# Altium PCB PCB1.PcbDoc
Units mil, origin at the board's own origin, x right, y up, seen from the top; angles counter-clockwise.
Board outline 6000 x 4000 mil, 2 copper layers (Top Layer, Bottom Layer); 17 components, 37 nets, 121 pads, 0 vias.
Unrouted connection lines stored in the file: 4.
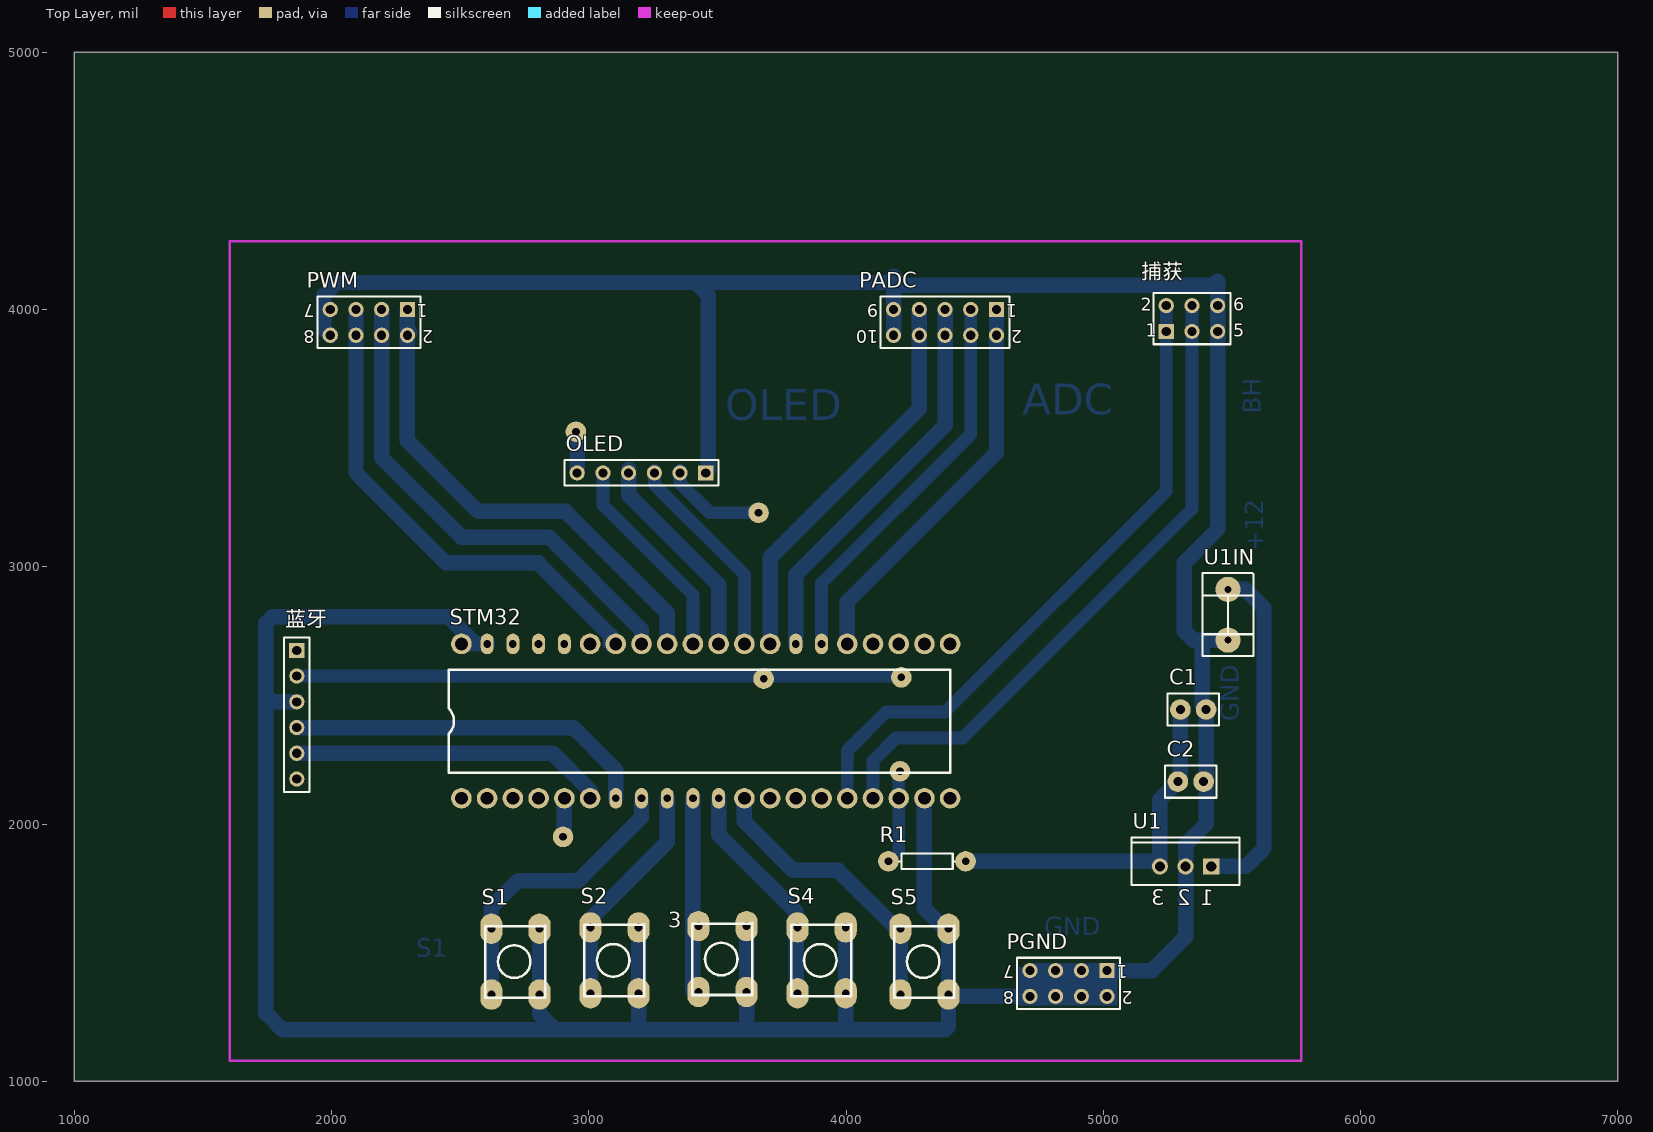
[diagram p0: Top Layer view]
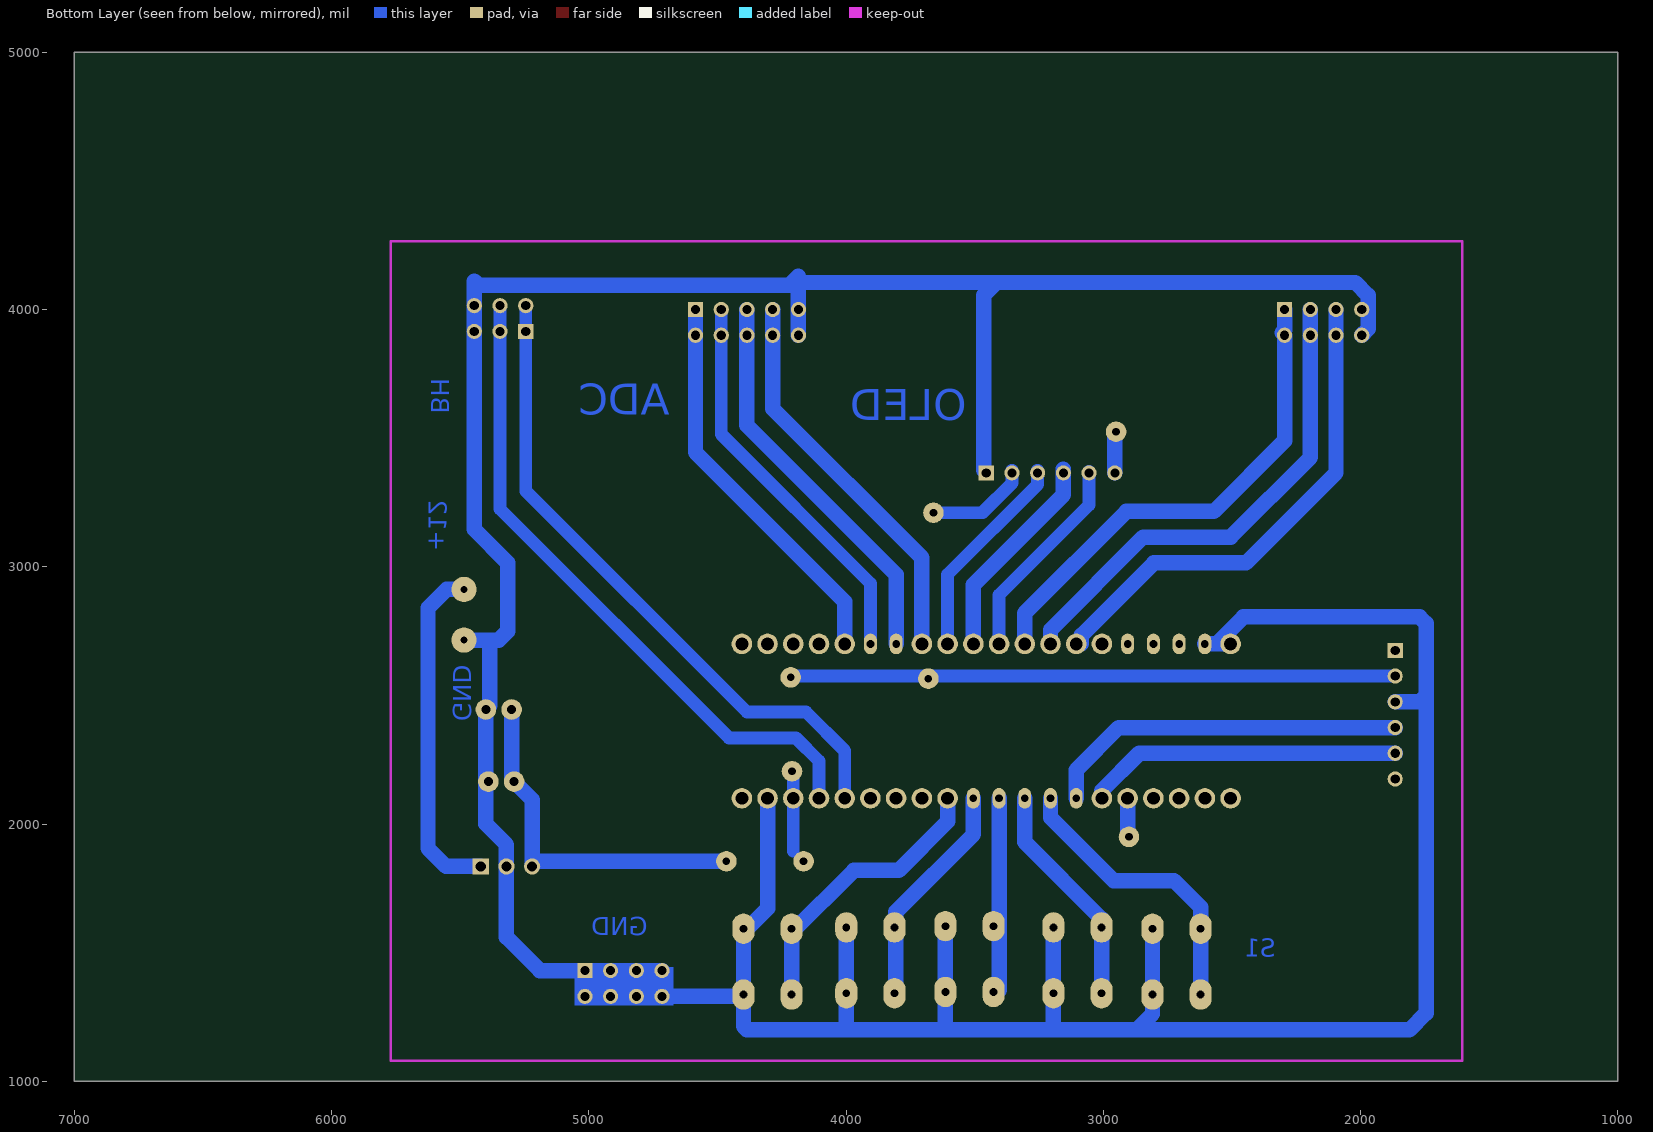
[diagram p1: Bottom Layer view, seen from below]

## Layer stack, top to bottom
Top Solder: solder mask 0.4, Solder Resist, Dk 3.5
Top Layer: signal copper 1.4
Dielectric 1: dielectric 12.6, FR-4, Dk 4.8
Bottom Layer: signal copper 1.4
Bottom Solder: solder mask 0.4, Solder Resist, Dk 3.5

## Board outline
1000,1000 7000,1000 7000,5000 1000,5000

## Design rules (kind name [scope] priority, off if disabled: settings)
Clearance [All] p1: gap=10
ComponentClearance [All] p1: gap=0 collisioncheckmode=3 verticalgap=0 showdistances=FALSE
PolygonConnect [All] p1: connectstyle=Relief reliefconductorwidth=10 reliefentries=4 polygonreliefangle="90 Angle" airgapwidth=10
RoutingVias [All] p1: holewidth=28 width=50 viastyle="Through Hole" minholewidth=28 minwidth=50 maxholewidth=28 maxwidth=50
SolderMaskExpansion [All] p1: expansion=4
Width [All] p1: maxlimit=80 minlimit=20 preferedwidth=50
29 further rules are at their usual default settings.

## Components (designator, comment, footprint, x,y, rotation, side; value= is the part's Value field where it differs from the comment)
3 "四脚按键" 四脚按键 3520,1475 r90 top
C1 "220" CAP 5400,2445 r270 top
C2 "0.1" CAP 5390,2165 r270 top
OLED "Header 6" HDR1X6 3455,3365 r180 top
PADC "Header 5X2" HDR2X5 4585,4000 r180 top
PGND "Header 4X2" HDR2X4 5015,1430 r180 top
PWM "Header 4X2" HDR2X4 2295,4000 r180 top
R1 "10" RES 4465,1855 r90 top
S1 "四脚按键" 四脚按键 2715,1465 r90 top
S2 "四脚按键" 四脚按键 3100,1470 r90 top
S4 "四脚按键" 四脚按键 3905,1470 r90 top
S5 "四脚按键" 四脚按键 4305,1465 r90 top
STM32 "Component_1" PCBComponent_1 3205,2100 r90 top
U1 "7805" SFM-T3/A4.7V 5320,1835 r180 top
U1IN "Header 2" tie-in 5485,2715 r90 top
捕获 "Header 3X2" HDR2X3 5245,3915 r0 top
蓝牙 "Header 6" HDR1X6 1865,2675 r270 top

## Footprints (in the part's own frame and the unit in brackets; to place one, negate y for a bottom-side part, rotate by r counter-clockwise, add the part's x,y. Pads: shape width x height; smd on the part's side, far side on the other; paste and mask are expansions set on the pad)
CAP [mil]
  round 80 hole 35: 1(0,0) 2(0,-100)
  silkscreen extent -63,-150 63,50
HDR1X6 [mm] "Connector; Header; 6 Position"
  rect 1.5x1.5 hole 0.9: 1(0,0)
  round 1.5 hole 0.9: 2(2.54,0) 3(5.08,0) 4(7.62,0) 5(10.16,0) 6(12.7,0)
  silkscreen extent -1.27,-1.27 13.97,1.27
HDR2X3 [mm] "Connector; Header; 3x2 Position"
  rect 1.5x1.5 hole 0.9: 1(0,0)
  round 1.5 hole 0.9: 2(0,2.54) 3(2.54,0) 4(2.54,2.54) 5(5.08,0) 6(5.08,2.54)
  silkscreen extent -1.27,-1.27 6.35,3.81
HDR2X4 [mm] "Connector; Header; 4x2 Position"
  rect 1.5x1.5 hole 0.9: 1(0,0)
  round 1.5 hole 0.9: 2(0,2.54) 3(2.54,0) 4(2.54,2.54) 5(5.08,0) 6(5.08,2.54) 7(7.62,0) 8(7.62,2.54)
  silkscreen extent -1.27,-1.27 8.89,3.81
HDR2X5 [mm] "Connector; Header; 5x2 Position"
  rect 1.5x1.5 hole 0.9: 1(0,0)
  round 1.5 hole 0.9: 2(0,2.54) 3(2.54,0) 4(2.54,2.54) 5(5.08,0) 6(5.08,2.54) 7(7.62,0) 8(7.62,2.54) 9(10.16,0) 10(10.16,2.54)
  silkscreen extent -1.27,-1.27 11.43,3.81
PCBComponent_1 [mil]
  round 80 hole 50: 1(0,700) 2(0,600) 3(0,500) 4(0,400) 5(0,300) 6(0,200) 12(0,-400) 13(0,-500) 14(0,-600) 15(0,-700) 16(0,-800) 17(0,-900) 18(0,-1000) 19(0,-1100) 20(0,-1200) 21(600,-1200) 22(600,-1100) 23(600,-1000) 24(600,-900) 25(600,-800) 28(600,-500) 29(600,-400) 30(600,-300) 31(600,-200) 32(600,-100) 33(600,0) 34(600,100) 35(600,200) 40(600,700)
  oval 80x50 hole 30: 7(0,100) 8(0,0) 9(0,-100) 10(0,-200) 11(0,-300) 26(600,-700) 27(600,-600) 36(600,300) 37(600,400) 38(600,500) 39(600,600)
  silkscreen extent 100,-1200 500,750
RES [mil]
  round 80 hole 30: 1(0,0) 2(0,300)
  silkscreen extent -30,41 30,259
SFM-T3/A4.7V [mm]
  rect 1.6x1.6 hole 1: 1(-2.54,0)
  round 1.6 hole 1: 2(0,0) 3(2.54,0)
  silkscreen extent -5.35,-2.85 5.35,1.85
tie-in [mm]
  round 2.5 hole 0.7: 1(0,0) 2(5,0)
  silkscreen extent -1.56,-2.5 6.6,2.54
四脚按键 [mm]
  oval 2.999x2.2 hole 0.762: 1(-3.25,-2.375) 1(3.25,-2.375) 2(-3.25,2.375) 2(3.25,2.375)
  silkscreen extent -3.55,-2.92 3.56,3

## Part data
C1 C2: library part CAP
OLED 蓝牙: "Header, 6-Pin"
PADC: "Header, 5-Pin, Dual row"
PGND PWM: "Header, 4-Pin, Dual row"
R1: library part res
U1: library part 78稳压块
U1IN: "Header, 2-Pin"
捕获: "Header, 3-Pin, Dual row"

## Free pads (board coordinates)
  round 80 hole 30: 0(4215,2570) 1(4210,2205) 2(2950,3525) 3(2900,1950) 4(3660,3210) 5(3680,2565)

## Nets (pads, with @x,y where several pads share a name; then routed paths per layer and width w, separated by ;. In a path a pad name is that pad's centre, name@x,y a point inside that pad or via, vN(x,y) a via of type N, cw(c..) or ccw(c..) an arc to the next point about the centre after c; other vN are vias at no path point)
3.3V: STM32.20 STM32.38
GND: 3.1 C1.1 C2.1 OLED.1 PADC.9 PADC.10 PGND.1 PGND.2 PGND.3 PGND.4 PGND.5 PGND.6 PGND.7 PGND.8 PWM.7 PWM.8 S1.1 S2.1 S4.1 S5.1 STM32.19 STM32.39 STM32.40 U1.2 U1IN.1 捕获.5 捕获.6 蓝牙.3 | length 16512.1
  Bottom Layer w60: 蓝牙.3 1770,2475 1745,2500 ; PWM.8 1970,3925 1970,4055 2020,4105 3415,4105 ; STM32.40 STM32.39 ; 2552.5,2707.5 2455,2805 1770,2805 1745,2780 1745,2500 ; S1.1@2808.5,1592.95 2808.5,1337.05 2808.5,1261.5 2870,1200 2910,1200 ; 3193.5,1213.5 3193.5,1342.05 S2.1@3193.5,1597.95 ; OLED.1@3465,3375 3465,4055 3415,4105 ; 3613.5,1203.5 3613.5,1347.05 3.1@3613.5,1602.95 ; 3998.5,1213.5 3998.5,1342.05 S4.1@3998.5,1597.95 ; 4160,4105 3415,4105 ; PADC.10 PADC.9 4185,4130 4220,4095 5430,4095 5445,4110 捕获.6 捕获.5 5445,3145 5315,3015 5315,2750 5350,2715 5385,2715 ; STM32.19 4305,1671.46 4398.5,1577.95 4398.5,1337.05 4398.5,1213.5 4385,1200 2910,1200 ; S5.1@4406.46,1330 PGND.8 PGND.6 PGND.4 PGND.2 ; PGND.7 PGND.5 PGND.3 PGND.1 5190,1430 5320,1560 U1.2 5320,1920 5400,2000 5400,2155 C2.1 ; C1.1@5385,2460 5385,2715 ; C2.1@5400,2175 C1.1 ; U1IN.1 5385,2715 ; 1745,2500 1745,1265 1810,1200 2910,1200
NetC1_2: C1.2 C2.2 R1.1 U1.3 | length 1378.1
  Bottom Layer w60: R1.1 U1.3@5200,1855 ; U1.3 5220,2095 C2.2 5300,2175 C1.2
NetU1_1: U1.1 U1IN.2 | length 1338.8
  Bottom Layer w60: U1.1 5555,1835 5625,1905 5625,2840 5553.15,2911.85 U1IN.2
PA0: PADC.1 PADC.2 STM32.25 | length 1540.2
  Bottom Layer w60: STM32.25 4005,2865 4585,3445 PADC.2 PADC.1
PA1: PADC.3 PADC.4 STM32.26 | length 1540.2
  Bottom Layer w50: STM32.26 3905,2935 4485,3515 PADC.4 PADC.3
PA2: PADC.5 PADC.6 STM32.27 | length 1540.2
  Bottom Layer w60: STM32.27 3805,2970 4385,3550 PADC.6 PADC.5
PA3: PADC.7 PADC.8 STM32.28 | length 1540.2
  Bottom Layer w60: STM32.28 3705,3035 4285,3615 PADC.8 PADC.7
PA4: OLED.3 STM32.29 | length 820
  Bottom Layer w50: OLED.3@3255,3375 3255,3320 3605,2970 STM32.29
PA5: OLED.4 STM32.30 | length 825
  Bottom Layer w60: OLED.4@3155,3380 3155,3280 3505,2930 STM32.30
PA6: OLED.5 STM32.31 | length 815
  Bottom Layer w50: OLED.5@3055,3370 3055,3240 3405,2890 STM32.31
PA7: PWM.1 PWM.2 STM32.32 | length 1911.7
  Bottom Layer w60: PWM.2 2295,3490 2570,3215 2910,3215 3305,2820 STM32.32 ; PWM.1 2295,3920 PWM.2@2305,3910
PA8: OLED.6 pad.2 pad.3 STM32.5 | length 280
  Bottom Layer w60: pad.3@2905,1975 STM32.5 ; OLED.6 pad.2@2955,3520
PA9: STM32.6 蓝牙.5 | length 1200.1
  Bottom Layer w60: 蓝牙.5 2860,2275 STM32.6@3005,2130
PA10: STM32.7 蓝牙.4 | length 1418.3
  Bottom Layer w60: 蓝牙.4 2940,2375 3105,2210 STM32.7
PA11: S1.2 STM32.8 | length 1147.3
  Bottom Layer w60: S1.2@2621.5,1332.05 2621.5,1587.95 2621.5,1676.5 2725,1780 2960,1780 3205,2025 STM32.8
PA12: S2.2 STM32.9 | length 891.6
  Bottom Layer w60: S2.2@3006.5,1332.05 3006.5,1587.95 3006.5,1631.5 3305,1930 STM32.9
PA15: 3.2 STM32.10 | length 746.5
  Bottom Layer w60: 3.2@3405,1353.54 STM32.10
PB0: PWM.3 PWM.4 STM32.33 | length 1917.5
  Bottom Layer w60: PWM.3 PWM.4 2195,3425 2505,3115 2845,3115 3205,2755 STM32.33
PB1: PWM.5 PWM.6 STM32.34 | length 1939.9
  Bottom Layer w60: PWM.5 PWM.6 2095,3365 2445,3015 2803.14,3015 3085,2733.14 3085,2700 STM32.34
PB3: S4.2 STM32.11 | length 897.8
  Bottom Layer w60: STM32.11 3505,1960 3806.5,1658.5 3806.5,1582.95 S4.2@3806.5,1327.05
PB4: S5.2 STM32.12 | length 1131.4
  Bottom Layer w60: STM32.12 3605,2010 3795,1820 3969.45,1820 4211.5,1577.95 S5.2@4211.5,1322.05
PB5: STM32.13
PB6: STM32.14
PB7: STM32.15
PB8: STM32.16 捕获.1 捕获.2 | length 2563.4
  Bottom Layer w50: STM32.16 4005,2285 4155,2435 4385,2435 5245,3295 捕获.1 捕获.2
PB9: STM32.17 捕获.3 捕获.4 | length 2580.9
  Bottom Layer w50: STM32.17 4105,2245 4195,2335 4455,2335 5345,3225 捕获.3 捕获.4
PB10: STM32.35
PB11: STM32.36
PB12: STM32.1
PB13: STM32.2
PB14: STM32.3
PB15: STM32.4
PC13: STM32.22
PC14: STM32.23
PC15: STM32.24
VCC: OLED.2 pad.0 pad.1 pad.4 pad.5 R1.2 STM32.18 蓝牙.2 | length 3041.8
  Bottom Layer w50: 蓝牙.2 4210,2575 pad.0@4220,2565 ; OLED.2@3355,3375 3355,3325 3470,3210 pad.4 ; 4205,1895 STM32.18 pad.1@4205,2175
pads on no net: STM32.21 STM32.37 蓝牙.1 蓝牙.6

## Keep-outs
Keep-Out Layer:
  lines w10: 1605,1080 1605,4265 5770,4265 5770,1080 1605,1080

## Other copper
Bottom Layer:
  rectangle net GND: 4670,1295 5055,1445
  text "BH" at 5635,3595 h120 r90
  text "ADC" at 4685,3590 h120
  text "OLED" at 3530,3570 h120
  text "+12" at 5645,3060 h120 r90
  text "GND" at 5550,2400 h120 r90
  text "GND" at 4770,1545 h120
  text "S1" at 2330,1460 h120

## Text inside footprints (layer, text, board x,y; h text height)
PADC: Top Overlay "2" at 4685,3920 h50 r180; Top Overlay "1" at 4665,4020 h50 r180; Top Overlay "9" at 4125,4020 h50 r180; Top Overlay "10" at 4125,3920 h50 r180
PGND: Top Overlay "8" at 4655,1350 h50 r180; Top Overlay "7" at 4655,1450 h50 r180; Top Overlay "1" at 5095,1450 h50 r180; Top Overlay "2" at 5115,1350 h50 r180
PWM: Top Overlay "8" at 1935,3920 h50 r180; Top Overlay "7" at 1935,4020 h50 r180; Top Overlay "1" at 2375,4020 h50 r180; Top Overlay "2" at 2395,3920 h50 r180
U1: Top Overlay "2" at 5339.69,1684.41 h59.06; Top Overlay "1" at 5429.84,1684.41 h59.06; Top Overlay "3" at 5239.69,1684.41 h59.06
捕获: Top Overlay "1" at 5165,3895 h50; Top Overlay "2" at 5145,3995 h50; Top Overlay "5" at 5505,3895 h50; Top Overlay "6" at 5505,3995 h50